# Altium PCB MADI_STM32G4_PCB_L4.PcbDoc (part 3 of 3)
Units mm, origin at the board's own origin, x right, y up, seen from the top; angles counter-clockwise.
Board outline 30 x 21.59 mm, 4 copper layers (L1, L2 (GND), L3 (GND), L4), stack 1.525 mm thick; 52 components, 52 nets, 268 pads, 180 vias.
Unrouted connection lines stored in the file: 135.
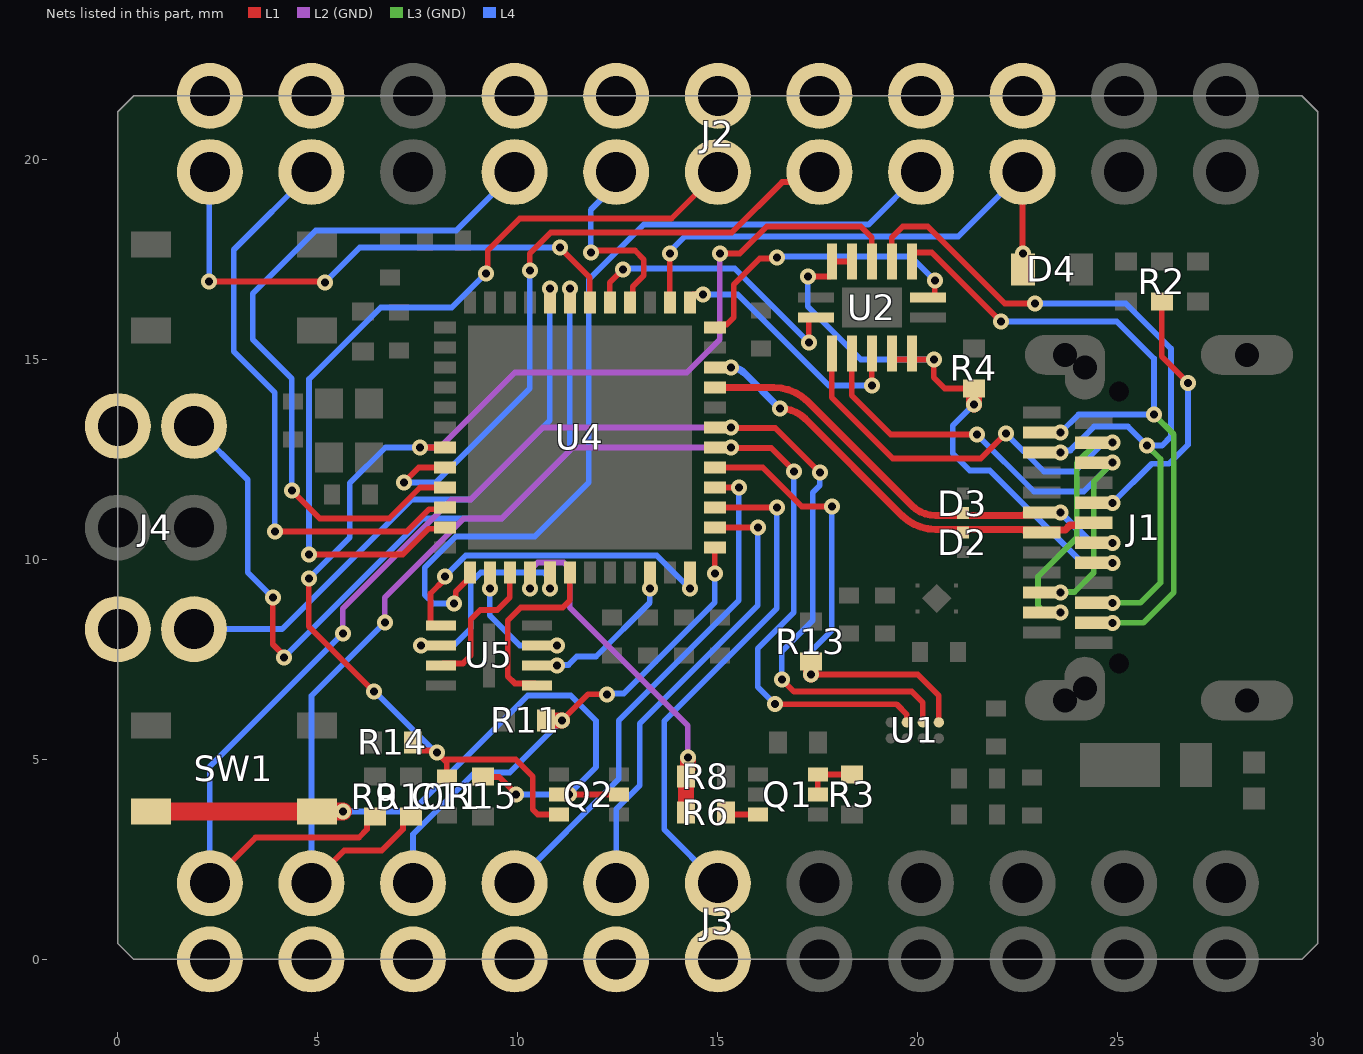
[diagram p4: the nets of this part, all layers, seen from the top]

## Via types
v1: diameter 0.4, hole 0.2, L1 to L4, tented both sides, 180 vias

## Nets (pads, with @x,y where several pads share a name; then routed paths per layer and width w, separated by ;. In a path a pad name is that pad's centre, name@x,y a point inside that pad or via, vN(x,y) a via of type N, cw(c..) or ccw(c..) an arc to the next point about the centre after c; other vN are vias at no path point) (continued)
NetJ1_B5: J1.B5 R2.2 | length 6.3
  L1 w0.146: R2.2@26.1,16.45 26.1,15.071 v1(26.756,14.415)
  L4 w0.146: v1(24.87,11.415) 25.845,12.39 26.281,12.39 26.756,12.865 v1(26.756,14.415)
NetQ1_3: Q1.3 R6.2 | length 0.8
  L1 w0.146: R6.2@15.2,3.675 15.25,3.625 Q1.3@16,3.625
NetQ1_5: Q1.5 Q1.6 R3.1 | length 1.3
  L1 w0.146: Q1.5@17.5,4.125 Q1.6@17.5,4.625 R3.1@18.35,4.625
NetQ2_2: Q2.2 Q2.5 R15.2 SW1.1 SW1.2 | length 18.3
  L1 w0.146: R15.2@9.125,4.575 9.137,4.563 9.537,4.563 9.95,4.15 v1(9.95,4.125) ; v1(11.275,4.125) Q2.5@12.525,4.125
  L1 w0.45: SW1.2@0.825,3.7 SW1.1@4.975,3.7 v1(5.625,3.7)
  L4 w0.146: v1(5.625,3.7) 7.35,3.7 10.25,6.6 11.325,6.6 11.957,5.968 11.957,4.807 v1(11.275,4.125) v1(9.95,4.125)
nIRQ_BQ: R13.2 U1.A1 U4.29 | length 12.2
  L1 w0.146: U4.29@14.925,12.3 16.125,12.3 17.1,11.325 v1(17.85,11.325) ; v1(17.325,7.125) 20,7.125 20.525,6.6 U1.A1@20.525,5.925
  L1 w0.4: v1(17.325,7.125) R13.2@17.325,7.45
  L4 w0.146: v1(17.325,7.125) 17.325,7.7 17.85,8.225 v1(17.85,11.325)
nRESET: C11.2 Q2.3 R14.1 U2.4 U4.7 | length 32.2
  L1 w0.146: v1(4.775,9.525) 4.775,8.325 v1(6.4,6.7) ; R14.1@7.375,5.425 7.375,5.375 7.525,5.225 7.925,5.225 v1(7.975,5.175) 8.225,4.925 ; v1(7.55,12.8) U4.7@8.175,12.8 ; C11.2@8.225,4.55 8.225,5 9.95,5 10.375,4.575 10.375,3.75 10.5,3.625 Q2.3@11.025,3.625 ; v1(15.05,17.65) 15.55,17.65 16.225,18.325 18.575,18.325 18.85,18.05 U2.4@18.85,17.45
  L2 (GND) w0.146: v1(7.55,12.8) 8.05,12.8 9.925,14.675 14.225,14.675 15.05,15.5 v1(15.05,17.65)
  L4 w0.146: v1(4.775,9.525) 5.8,10.55 5.8,11.91 6.69,12.8 v1(7.55,12.8) ; v1(6.4,6.7) 6.425,6.7 7.95,5.175 v1(7.975,5.175)
nRESET_SW: J1.A10 J1.B10 U2.3 | length 19.4
  L1 w0.146: U2.3@19.35,17.45 19.35,18.05 19.625,18.325 20.25,18.325 22.175,16.4 v1(22.925,16.4)
  L3 (GND) w0.146: v1(24.87,8.915) 25.565,8.915 26.066,9.416 26.066,12.51 v1(25.731,12.845)
  L4 w0.146: v1(22.925,16.4) 25.2,16.4 26.326,15.274 26.326,13.064 26.106,12.845 v1(25.731,12.845) 25.256,13.32 24.406,13.32 23.813,12.727 23.622,12.727 v1(23.57,12.675)
PA0/ADC1_IN1: J2.5 U4.8 | length 16.8
  L1 w0.146: v1(7.15,11.925) 7.525,12.3 U4.8@8.175,12.3 ; v1(10.3,17.225) 10.3,17.65 10.825,18.175 15.35,18.175 16.608,19.433 17.288,19.433 J2.5@17.54,19.685
  L4 w0.146: v1(7.15,11.925) 7.95,11.925 10.3,14.275 v1(10.3,17.225)
PA1/UART2_DE: J2.8 U4.9 | length 17.6
  L1 w0.146: v1(4.35,11.725) 5.05,11.025 6.78,11.025 7.555,11.8 U4.9@8.175,11.8
  L4 w0.146: v1(4.35,11.725) 4.35,14.524 3.375,15.499 3.375,16.65 4.95,18.225 8.46,18.225 J2.8@9.92,19.685
PA2/UART2_TX: J2.10 U4.10 | length 14.7
  L1 w0.146: v1(3.925,10.7) 7.225,10.7 7.778,11.253 8.128,11.253 U4.10@8.175,11.3
  L4 w0.146: v1(3.925,10.7) 3.925,14.175 2.9,15.2 2.9,17.745 J2.10@4.84,19.685
PA3/ADC1_IN4: J2.6 U4.11 | length 20.7
  L1 w0.146: v1(4.782,10.125) 7.125,10.125 7.766,10.766 8.141,10.766 U4.11@8.175,10.8 ; v1(9.2,17.15) 9.248,17.198 9.248,17.723 10.05,18.525 13.84,18.525 J2.6@15,19.685
  L4 w0.146: v1(4.782,10.125) 4.782,14.507 6.575,16.3 8.35,16.3 v1(9.2,17.15)
PA5/DAC1_OUT2: J2.4 U4.13 | length 21.9
  L1 w0.146: v1(8.4,8.9) 8.448,8.948 8.448,9.198 8.8,9.55 U4.13@8.8,9.675
  L4 w0.146: v1(8.4,8.9) 7.889,8.901 7.675,9.115 7.675,9.8 8.45,10.575 10.425,10.575 11.775,11.925 11.775,17 13.15,18.375 18.77,18.375 J2.4@20.08,19.685
PA8/I2C2_SDA: J3.10 R10.1 U1.C1 U4.30 | length 33.6
  L1 w0.146: J3.10@4.84,1.905 5.66,2.725 6.6,2.725 7.128,3.253 7.128,3.425 7.324,3.62 R10.1@7.325,3.62 ; U4.30@14.925,12.8 14.937,12.787 16.338,12.787 16.9,12.225 v1(16.9,12.2) ; v1@16.425,6.375 v1(16.43,6.38) 19.47,6.38 19.725,6.125 U1.C1@19.725,5.925
  L2 (GND) w0.146: v1(6.675,8.425) 6.675,9.05 8.65,11.025 9.6,11.025 11.375,12.8 v1(15.325,12.8)
  L4 w0.146: J3.10@4.84,1.905 4.84,6.59 v1(6.675,8.425) ; v1(16.43,6.38) 16,6.81 16,7.775 16.9,8.675 v1(16.9,12.2)
PA9/I2C2_SCL: J3.11 R9.1 U1.B1 U4.31 | length 37.7
  L1 w0.146: J3.11@2.3,1.905 3.445,3.05 6.027,3.05 6.232,3.255 6.232,3.426 6.404,3.598 R9.1@6.428,3.598 ; U4.31@14.925,13.3 14.937,13.287 16.438,13.287 v1(17.55,12.175) ; v1(16.6,7) 16.901,6.7 19.85,6.7 20.125,6.425 U1.B1@20.125,5.925
  L2 (GND) w0.146: v1(5.625,8.15) 5.625,8.775 8.35,11.5 8.825,11.5 10.625,13.3 v1(15.325,13.3)
  L4 w0.146: J3.11@2.3,1.905 2.3,4.825 v1(5.625,8.15) ; v1(16.6,7) 16.6,7.7 17.375,8.475 17.375,11.675 17.549,11.849 v1(17.55,12.175)
PA15/TIM2_CH1: D4.K J2.3 U4.38 | length 13
  L1 w0.146: U4.38@13.8,16.425 v1(13.8,17.65) ; v1@22.6,17.65 22.62,17.67 J2.3@22.62,19.685
  L4 w0.146: v1(13.8,17.65) 13.8,17.7 14.175,18.075 21.01,18.075 J2.3@22.62,19.685
  other v1: 22.625,17.65
PB4/UART2_RX: J2.11 U4.42 | length 13.6
  L1 w0.146: v1(2.275,16.95) 5.15,16.95 v1(5.175,16.925) ; v1(11.05,17.8) 11.8,17.05 U4.42@11.8,16.425
  L4 w0.146: v1(2.275,16.95) 2.288,16.963 2.288,19.673 J2.11@2.3,19.685 ; v1(5.175,16.925) 6.05,17.8 v1(11.05,17.8)
PB5/FDCAN2_RX: J4.3 U4.43 | length 20.1
  L1 w0.146: v1(3.875,9.05) 3.875,7.876 4.15,7.601 v1(4.15,7.55)
  L4 w0.146: J4.3@1.905,13.335 3.25,11.99 3.25,9.675 v1(3.875,9.05) ; v1(4.15,7.55) 7.625,11.025 9.6,11.025 11.3,12.725 v1(11.3,16.775)
PB6/FDCAN2_TX: J4.1 U4.44 | length 14.8
  L4 w0.146: J4.1@1.225,8.35 J4.1@1.55,8.675 ; J4.1@1.905,8.255 4.106,8.256 7.35,11.5 8.825,11.5 10.8,13.475 v1(10.8,16.775)
PB12/SPI2_nCS: J3.9 R11.1 U4.25 | length 12.9
  L1 w0.146: v1(11.1,5.975) 11.752,6.627 12.223,6.627 v1(12.225,6.625) ; v1(14.925,9.649) U4.25@14.925,10.3
  L1 w0.4: R11.1@10.7,5.975 v1(11.1,5.975)
  L4 w0.146: J3.9@7.38,1.905 7.38,3.13 8.925,4.675 9.8,4.675 v1(11.1,5.975) ; v1(12.225,6.625) 12.25,6.65 12.65,6.65 14.925,8.925 v1(14.925,9.649)
PB13/SPI2_SCK: J3.7 U4.26 | length 11.4
  L1 w0.146: U4.26@14.925,10.8 v1(16,10.8)
  L4 w0.146: J3.7@12.46,1.905 12.46,3.76 13.05,4.35 13.05,5.9 16,8.85 v1(16,10.8)
PB14/SPI2_MISO: J3.6 U4.27 | length 12.7
  L1 w0.146: U4.27@14.925,11.3 v1(16.475,11.3)
  L4 w0.146: J3.6@15,1.905 13.659,3.246 13.659,5.959 16.475,8.775 v1(16.475,11.3)
PB15/SPI2_MOSI: J3.8 U4.28 | length 13
  L1 w0.146: U4.28@14.925,11.8 v1(15.525,11.8)
  L4 w0.146: J3.8@10.054,1.905 J3.8@9.92,1.905 12.525,4.51 12.525,5.975 15.525,8.975 v1(15.525,11.8)
PC11: J2.7 U4.40 | length 4.9
  L1 w0.146: v1(11.825,17.675) 11.873,17.723 12.927,17.723 13.15,17.5 13.15,17.1 12.875,16.825 12.875,16.5 U4.40@12.8,16.425
  L4 w0.146: v1(11.825,17.675) 11.825,18.739 12.46,19.374 J2.7@12.46,19.685
QSPI_DATA0: U4.18 U5.5 | length 4.7
  L1 w0.146: U5.5@10.475,6.85 10.423,6.902 9.923,6.902 9.75,7.075 9.75,8.475 10.075,8.8 11.125,8.8 11.3,8.975 U4.18@11.3,9.675
QSPI_DATA1: U4.17 U5.2 | length 5
  L4 w0.146: v1(7.575,7.85) 8.4,7.85 8.825,8.275 8.825,9.425 9.075,9.675 10.65,9.675 10.774,9.551 10.774,9.301 v1(10.8,9.275)
QSPI_DATA2: U4.15 U5.3 | length 3.6
  L1 w0.146: U5.3@8.075,7.35 8.127,7.402 8.627,7.402 8.825,7.6 8.825,8.5 9.063,8.737 9.488,8.737 9.8,9.05 U4.15@9.8,9.675
QSPI_DATA3: U4.14 U5.7 | length 2.7
  L4 w0.146: v1(9.3,9.275) 9.3,8.6 10.05,7.85 v1(10.975,7.85)
QSPI_nCS: U4.24 U5.1 | length 8.3
  L1 w0.146: U5.1@8.075,8.35 7.867,8.35 7.815,8.402 7.815,9.147 8.175,9.507 v1(8.175,9.575)
  L4 w0.146: v1(8.175,9.575) 8.7,10.1 13.475,10.1 v1(14.3,9.275)
QSPI_SCK: U4.22 U5.6 | length 3.3
  L4 w0.146: v1(10.975,7.35) 10.988,7.363 11.263,7.363 11.475,7.575 11.955,7.575 13.3,8.92 v1(13.3,9.275)
SW_CONTROL: J1.B8 R4.2 U2.5 U2.6 U2.12 U2.13 | length 15.7
  L1 w0.146: v1(17.25,17.075) 17.8,17.075 17.85,17.125 U2.6@17.85,17.175 ; U2.6@17.85,17.238 U2.6@17.85,17.45 U2.5@18.35,17.45 ; U2.12@19.35,15.15 19.35,15.05 19.4,15 19.8,15 U2.13@19.85,15.05 ; U2.13@19.85,15.15 U2.13@19.85,15.05 ; R4.2@21.4,14.275 20.675,14.275 20.4,14.55 v1(20.4,15) 19.9,15 U2.13@19.85,15.05
  L1 w0.4: v1(21.4,13.875) R4.2@21.4,14.275
  L4 w0.146: v1(17.25,17.075) 17.25,16.325 18.575,15 v1(20.4,15) ; v1(21.4,13.875) 20.875,13.35 20.875,12.65 21.3,12.225 21.8,12.225 24.11,9.915 v1(24.87,9.915)
SWDCLK: U2.11 U4.37 | length 6.4
  L1 w0.146: U4.37@14.3,16.425 14.3,16.55 14.375,16.625 v1(14.625,16.625) ; v1(18.85,14.35) U2.11@18.85,15.15
  L4 w0.146: v1(14.625,16.625) 15.5,16.625 17.775,14.35 v1(18.85,14.35)
SWDCLK_SW: J1.A3 J1.B3 U2.10 | length 12.8
  L1 w0.146: U2.10@18.35,15.15 18.35,14.1 19.325,13.125 v1(21.475,13.125)
  L3 (GND) w0.146: v1(23.57,9.175) 23.579,9.184 23.92,9.184 24.4,9.664 24.4,11.945 v1@24.87,12.415
  L4 w0.146: v1(21.475,13.125) 22.903,11.697 24.147,11.697 v1(24.867,12.418)
SWDIO: U2.1 U4.36 | length 7.5
  L1 w0.146: U4.36@14.925,15.8 15,15.875 15.225,15.875 15.4,16.05 15.4,16.875 16.05,17.525 16.45,17.525 v1(16.475,17.55) ; U2.1@20.25,16.55 20.375,16.55 20.425,16.6 v1(20.425,16.975)
  L4 w0.146: v1(16.475,17.55) 16.5,17.575 19.825,17.575 v1(20.425,16.975)
SWDIO_SW: J1.A11 J1.B11 U2.2 | length 17.8
  L1 w0.146: U2.2@19.85,17.45 19.85,17.625 19.9,17.675 20.35,17.675 v1(22.075,15.95)
  L3 (GND) w0.146: v1(24.87,8.415) 25.64,8.415 26.4,9.175 26.4,13.126 v1(25.906,13.62)
  L4 w0.146: v1(22.075,15.95) 24.975,15.95 25.906,15.019 ; v1(23.57,13.175) 24.015,13.62 v1(25.906,13.62) 25.906,15.03
SWO: U2.8 U4.41 | length 7
  L1 w0.146: U4.41@12.3,16.425 12.3,16.925 v1(12.625,17.25) ; v1(17.275,15.425) 17.275,16.025 U2.8@17.3,16.05
  L4 w0.146: v1(12.625,17.25) 12.65,17.275 15.425,17.275 v1(17.275,15.425)
SWO_SW: J1.A2 J1.B2 U2.9 | length 15.4
  L1 w0.146: U2.9@17.85,15.15 17.85,14.05 19.375,12.525 21.575,12.525 v1(22.2,13.15)
  L3 (GND) w0.146: v1(23.57,8.675) 23.176,8.675 23.006,8.845 23.006,9.57 23.975,10.539 23.975,12.414 24.481,12.92 24.865,12.92 v1@24.87,12.915
  L4 w0.146: v1(22.2,13.15) 23.153,12.197 23.922,12.197 24.604,12.879 24.829,12.879 v1(24.867,12.918)
USB_D_N: D3.1 J1.A7 J1.B7 U4.33 | length 11.1
  L1 w0.18: U4.33@14.925,14.3 16.396,14.3 cw(c16.396,13.096) 17.247,13.948 ; 17.247,13.947 19.847,11.347 ccw(c20.445,11.945) 20.445,11.1 22.615,11.1 22.627,11.113 23.038,11.113 J1.A7@23.1,11.175
  L4 w0.18: v1(23.57,11.175) 24.33,10.415 v1(24.87,10.415)
USB_D_P: D2.1 J1.A6 J1.B6 U4.34 | length 10.8
  L1 w0.18: v1(16.55,13.775) cw(c16.55,12.87) 17.19,13.51 19.6,11.1 ccw(c20.445,11.945) 19.601,11.099 ccw(c20.445,11.945) 20.445,10.75 20.6,10.75 22.615,10.75 22.627,10.737 23.038,10.737 J1.A6@23.1,10.675 23.162,10.737 23.684,10.737 23.799,10.853 24.338,10.853 J1.B6@24.4,10.915
  L4 w0.18: v1(15.325,14.8) cw(c15.325,14.317) 15.522,14.758 cw(c15.325,14.317) 15.666,14.659 ; 15.666,14.659 v1(16.55,13.775)
VBAT_MON: R6.1 R8.2 U4.16 | length 9
  L1 w0.4: R6.1@14.2,3.625 14.2,4.525 14.225,4.55 14.225,4.767 14.25,4.792 v1@14.25,5
  L2 (GND) w0.146: v1(10.3,9.275) 10.3,9.725 10.5,9.925 11.15,9.925 11.3,9.775 11.3,8.8 14.25,5.85 v1(14.25,5.05)
  L4 w0.146: v1@14.25,5 v1(14.25,5.05)
pads on no net: J1.0 J1.A8 U4.2 U4.3 U4.4 U4.12 U4.32 U4.39 U4.45 U4.47 U5.9

## Polygon pours and split planes (outlines as drawn)
GND on L1 "NONET_L-01_P-001" (solid, remove dead copper, pour order 53): 6.555,19.685 6.555,18.003 6.758,17.8 7.25,17.8 7.325,17.725 7.875,17.725 7.875,18.225 8.205,18.555 8.205,19.685
GND on L1 "NONET_L-01_P-001" (solid, remove dead copper, pour order 52): 15.3,7.8 15.3,6.8 15.15,6.65 14.85,6.65 14.1,7.4 12.1,7.4 12.5,7.8
+3V3 on L1 "NONET_L-01_P-001" (solid, remove dead copper, pour order 51): 2.65,15.125 2.375,15.4 0.325,15.4 0.325,16.05 5.475,16.05 5.475,15.4 4.125,15.4 3.25,14.525
+3V3 on L1 "NONET_L-01_P-001" (solid, remove dead copper, pour order 50): 4.063,5.994 3.944,5.875 3.244,5.875 2.45,5.875 2.45,6.15 3.25,6.95 4.063,6.137
+3V3 on L1 "NONET_L-01_P-001" (solid, remove dead copper, pour order 48): 8.425,18.225 8.425,17.725 7.95,17.25 6.55,17.25 6.55,16.825 7.15,16.825 7.45,16.825 7.9,16.375 7.9,15.65 8.45,15.65 8.45,15.95 8.65,16.15 8.95,16.15 8.95,16.7 8.825,16.825 8.825,18.225
SWDCLK on L1 "NONET_L-01_P-001" (solid, remove dead copper, pour order 44): 14.775,16.75 14.65,16.875 14.325,16.875 14.15,16.7 14.15,16.15 14.45,16.15 14.775,16.475
nIRQ_BQ on L1 "NONET_L-01_P-001" (solid, remove dead copper, pour order 42): 17.6,7.675 17.6,7.225 17.7,7.125 17.325,7.125 17.325,7.675
+3V3 on L1 "NONET_L-01_P-001" (solid, remove dead copper, pour order 7): 9.45,5.225 10.075,5.225 10.125,5.175 11.125,5.175 11.25,5.3 10.975,5.575 10,5.575 9.925,5.65 9.925,6.25 9.875,6.3 0.225,6.3 0.225,5.525 0.6,5.15 5.805,5.15 6.153,4.801 6.153,4.351 7.599,4.351 7.6,4.35 7.6,4.8 6.705,4.8 6.6,4.905 6.6,5.8 6.7,5.9 7.9,5.9 8.622,5.178 9.403,5.178
+VSYS on L1 "NONET_L-01_P-001" (solid, remove dead copper, pour order 0): 21.225,4.825 21.075,4.975 20.75,4.975 20.24,5.485 20.24,5.525 20.01,5.525 20.01,4.44 20.175,4.275 21.225,4.275
GND on L1 "NONET_L-01_P-001" (solid, remove dead copper, pour order 3): 18.85,5 18.85,4.375 18.95,4.275 19.325,4.275 19.44,4.39 19.44,5.525 19.325,5.64 18.665,5.64 18.575,5.55 18.575,5.275
+VBAT on L1 "NONET_L-01_P-001" (solid, remove dead copper, pour order 4): 19.125,2.035 19.125,3.05 18.775,3.4 17.3,3.4 17.25,3.45 17.25,3.8 17.3,3.85 19.175,3.85 19.61,4.285 19.61,5.525 19.84,5.525 19.84,4.285 20.25,3.875 21.225,3.875 21.225,2.225 20.905,1.905 19.255,1.905
+VIN_5V0 on L1 "NONET_L-01_P-001" (solid, remove dead copper, pour order 5): 24.55,3.725 25.175,3.725 25.65,3.25 26.05,3.65 26.05,5.405 25.815,5.64 20.525,5.64 20.525,5.41 20.915,5.41 21.325,5 22.35,5 22.6,4.75 22.6,4.35 23.925,4.35
GND on L1 "NONET_L-01_P-001" (solid, remove dead copper, pour order 6): 22.175,4.775 22.175,4.225 22.6,3.8 23.1,3.8 23.445,3.455 23.445,1.905 21.795,1.905 21.775,1.925 21.775,4.775
GND on L1 "NONET_L-01_P-001" (solid, remove dead copper, pour order 8): 22.63,7.76 22.63,8.327 23.57,8.327 23.83,8.067 24.87,8.067 24.87,7.762 24.684,7.577 24.684,6.114 24.525,5.955 21.325,5.955 21.225,6.055 21.225,6.355
GND on L1 "NONET_L-01_P-001" (solid, remove dead copper, pour order 12): 26.375,17.225 24.925,17.225 24.925,17.675 25.3,18.05 26,18.05 26.375,17.675
GND on L1 "NONET_L-01_P-001" (solid, remove dead copper, pour order 17): 22.681,13.975 22.381,13.675 22.534,13.523 23.67,13.523 23.93,13.263 24.87,13.263 24.87,13.567 24.681,13.756 24.681,15.113 22.681,15.113
+VBUS on L1 "NONET_L-01_P-001" (solid, remove dead copper, pour order 18): 23.938,9.567 23.93,9.56 23.93,9.262 25.267,9.262 25.95,8.58 25.95,5.875 26.55,5.275 26.55,4.425 27.35,4.425 27.35,5.625 26.85,6.125 26.85,11.375 26.158,12.067 23.893,12.067 23.898,12.062 23.898,11.762 25.567,11.762 25.95,11.38 25.95,9.905 25.612,9.567
GND on L1 "NONET_L-01_P-001" (solid, remove dead copper, pour order 32): 18.025,8.35 18.025,7.675 18.27,7.43 20.25,7.43 20.25,7.93 20.265,7.944 20.265,8.68 20.115,8.83 19.875,8.83 19.875,8.488 19.737,8.35
+VSYS on L1 "NONET_L-01_P-001" (solid, remove dead copper, pour order 33): 21.211,9.65 21.25,9.611 21.25,8.375 21.25,7.1 21.2,7.05 20.85,7.05 20.8,7.1 20.8,8.35 20.685,8.465 20.685,8.68 20.835,8.83 20.835,9.22 20.685,9.37 20.685,9.585 20.75,9.65
GND on L1 "NONET_L-01_P-001" (solid, remove dead copper, pour order 37): 7.975,3.8 7.975,3.2 8.325,2.85 9.05,2.85 9.4,3.2 9.4,3.8
nRESET on L1 "NONET_L-01_P-001" (solid, remove dead copper, pour order 38): 8.475,4.827 8.624,4.976 8.575,5.025 7.9,5.7 7.15,5.7 7.15,5.15 7.6,5.15 7.975,4.775 7.975,4.35 8.475,4.35
GND on L1 "NONET_L-01_P-001" (solid, remove dead copper, pour order 40): 20.306,8.488 20.306,7.985 20.265,7.944 19.875,8.334 19.875,8.83 19.912,8.83 20.475,9.393 20.843,9.025
+3V3 on L1 "NONET_L-01_P-001" (solid, remove dead copper, pour order 41): 15.825,9.75 14.825,8.75 14.175,8.75 13.95,8.975 13.95,9.95 13.65,9.95 13.65,8.95 13.45,8.75 13.15,8.75 12.95,8.95 12.95,9.95 12.15,9.95 12.15,8.921 11.9,8.671 11.9,8.55 11.37,8.55 11.17,8.35 15.3,8.35 15.625,8.025 15.625,7.675 15.925,7.675 16.475,8.225 17.6,8.225 17.6,8.675 17.825,8.9 19.795,8.9 20.265,9.37 20.265,9.61 20.125,9.75
+3V3 on L4 "NONET_L-01_P-001" (solid, remove dead copper, pour order 49): 18.725,8.9 18.725,9.1 19.075,9.45 19.075,12.675 19.525,13.125 18.375,13.125 18.8,12.7 18.8,10.545 18.082,9.827 18.082,9.248 18.43,8.9
+VSYS on L4 "NONET_L-01_P-001" (solid, remove dead copper, pour order 29): 20.175,5.05 20.175,4.1 20.55,3.725 23.375,3.725 24.335,2.765 24.335,1.905 25.985,1.905 25.985,3.04 24.75,4.275 20.9,4.275 20.575,4.6 20.575,5.05
GND on L2 (GND) "NONET_L-01_P-001" (solid, remove dead copper, pour order 45): -2.5,25 -2.5,-2.5 35,-2.5 35,25
GND on L3 (GND) "NONET_L-01_P-001" (solid, remove dead copper, pour order 46): -2.5,25 -2.5,-2.5 35,-2.5 35,25

## Keep-outs
Keep-Out Layer:
  text ".Layer_Name" at 22,-15.5 h1.52

## Other copper
L1:
  rectangle net GND: 21.55,5.955 22.325,6.25
  text ".Layer_Name" at 22,-15.5 h1.52
L2 (GND):
  text ".Layer_Name" at 22,-15.5 h1.52
L3 (GND):
  text ".Layer_Name" at 22,-15.5 h1.52
L4:
  text ".Layer_Name" at 22,-15.5 h1.52

## Silkscreen, mask and mechanical layers (free items; w line width, h text height)
Top Overlay:
  region: 115.3,51.8
  text ".VersionRevision" at 27.973,16.372 h1.5
  text ".Layer_Name" at 22,-15.5 h1.52
Bottom Overlay:
  text "A1" at 9.366,17.028 h1.5 r270
  text "A3" at 14.446,16.863 h1.5 r270
  text "A0" at 16.986,16.866 h1.5 r270
  text "A5" at 19.526,16.868 h1.5 r270
  text "RX" at 1.746,16.775 h1.5 r270
  text "TX" at 4.286,16.75 h1.5 r270
  text "C11" at 11.906,16.378 h1.5 r270
  text "A15" at 22.066,16.144 h1.5 r270
  text "GND" at 24.606,15.94 h1.5 r270
  text "3V3" at 27.146,15.94 h1.5 r270
  text "BOOT" at 0.575,15.837 h1.5 r180
  text "GND" at 6.826,15.822 h1.5 r270
  text "B5" at 2.991,13.856 h1.5 r180
  text "GND" at 2.991,11.317 h1.5 r180
  text "B6" at 2.991,8.777 h1.5 r180
  text "`" at 9.745,7.212 h15 r270
  text "STM32G4" at 6.925,6.973 h2.5 r270
  text "RST" at 0.665,6.887 h1.5 r180
  text "SCL" at 1.871,3.1 h1.5 r270
  text "SDA" at 4.411,3.1 h1.5 r270
  text "nCS" at 6.951,3.101 h1.5 r270
  text "MOSI" at 9.491,3.1 h1.5 r270
  text "SCK" at 12.031,3.1 h1.5 r270
  text "MISO" at 14.571,3.1 h1.5 r270
  text "GND" at 16.998,3 h1.5 r270
  text "BAT" at 19.551,3 h1.5 r270
  text "GND" at 22.078,3 h1.5 r270
  text "SYS" at 24.618,3 h1.5 r270
  text "VIN" at 27.159,3 h1.5 r270
  text ".Layer_Name" at 22,-15.5 h1.52
Top Paste:
  text ".Layer_Name" at 22,-15.5 h1.52
Bottom Paste:
  text ".Layer_Name" at 22,-15.5 h1.52
Top Solder:
  text ".Layer_Name" at 22,-15.5 h1.52
Bottom Solder:
  text ".Layer_Name" at 22,-15.5 h1.52
Drill Guide:
  text ".Layer_Name" at 22,-15.5 h1.52
Board Outline:
  the board outline again, w0
  text ".Layer_Name" at 22,-15.5 h1.52
Top Assembly:
  text "COMPONENTS MARKED 'DNP' SHOULD NOT BE POPULATED." at 0,-7.001 h1.52
  text ".Layer_Name" at 22,-15.5 h1.52
Bottom Assembly:
  text "COMPONENTS MARKED 'DNP' SHOULD NOT BE POPULATED." at 131,-7.001 h1.52
  text ".Layer_Name" at 22,-15.5 h1.52
Top Courtyard:
  text ".Layer_Name" at 22,-15.5 h1.52
Bottom Courtyard:
  text ".Layer_Name" at 22,-15.5 h1.52
Top 3D Body:
  text ".Layer_Name" at 22,-15.5 h1.52
Bottom 3D Body:
  text ".Layer_Name" at 22,-15.5 h1.52
Top Designator:
  text ".Layer_Name" at 22,-15.5 h1.52
Bottom Designator:
  text ".Layer_Name" at 22,-15.5 h1.52
Gerber Information:
  lines w0.1: 0,-17 111,-17 ; 0,-12.5 131,-12.5 ; 55,-21.5 55,-8 ; 111,-21.5 111,-8 ; 0,-21.5 0,-8 131,-8 131,-21.5 0,-21.5
  text "ALL ARTWORK VIEWED FROM TOP SIDE" at 2,-11 h1.52
  text "PRJ TITLE =" at 57.5,-11 h1.52
  text ".Project" at 76,-11 h1.52
  text "REV =" at 113,-11 h1.52
  text ".VersionRevision" at 122.5,-11 h1.52
  text "LAYER NAME =" at 2,-15.5 h1.52
  text "PRJ # =" at 57.5,-15.5 h1.52
  text ".ProjectNumber" at 70,-15.5 h1.52
  text "DRAWN BY" at 113,-15.5 h1.52
  text ".DrawnBy" at 115.5,-19.5 h1.52
  text "CONTACT =" at 2,-20 h1.52
  text ".Contact" at 17.5,-20 h1.52
  text "GENERATED =" at 57.5,-20 h1.52
  text ".Print_Date" at 76.5,-20 h1.52
  text ".Print_Time" at 94,-20 h1.52
Fab Notes:
  lines w0.2: -0.02,16.535 -1.32,16.535 0,17.855 0,8.255 ; 2.3,0 33.605,0 32.285,1.32 32.285,0.02 ; 2.3,21.59 33.605,21.59 32.285,22.91 32.285,21.61 ; 34.595,10.895 34.595,12.195 33.275,10.875 57.575,10.875
  lines w2.5: 31.25,5.795 31.25,15.795
  text "TYPE;" at 103.325,125.2 h2.54
  text "Impedance;" at 116.025,125.2 h2.54
  text "Layer (Reference);" at 136.345,125.174 h2.54
  text "Width (um);" at 171.905,125.174 h2.54
  text "Gap (um);" at 194.765,125.172 h2.54
  text "50 ohm;" at 116.025,122.655 h2.54
  text "146;" at 171.905,122.655 h2.54
  text "SE;" at 103.325,122.632 h2.54
  text "L1(L2), L4(L3);" at 136.345,122.634 h2.54
  text "DIFF;" at 103.325,120.16 h2.54
  text "90 ohm;" at 116.025,120.155 h2.54
  text "L1(L2), L4(L3);" at 136.345,120.134 h2.54
  text "180;" at 171.905,120.155 h2.54
  text "170;" at 194.805,120.155 h2.54
  text "Files / *.GTO - Top Overlay / *.GTP - Top Paste / *.GTS - Top Solder / *.GTL - L1 / *.G1 - L2 (GND) / *.G2  - L3 / *.GBL - L4 / *.GBS - Bottom Solder / *.GBP - Bottom Paste / *.GBO - Bottom Overlay / *.GM1 - Board Outline / *.GM12 - Fab Notes / *.GD1 - Drill Drawing / *.GG1 - Drill Guide /  / Layer Stack Table: JLC3313" at 0,110.698 h2.54
  text "BOARD INFORMATION /  / Minimum Track: 146um / Minimum Gap: 100um / Minimum Through Hole VIA: 0.20mm (drill). Drilling: L1-L4 /  / 1. REMOVE ALL NON-FUNCTIONAL INNER LAYER PADS. /  / 2. THIS BOARD CONTAINS IMPEDANCE CONTROLLED TRACKS, TRACK AND GAP SIZES ARE AS FOLLOWS: /  /  /  /  /  /  /  / 3. FINISHED PANEL THICKNESS IS NOT CRITICAL: TO BE APPROXIMATELY 1.6mm /  / 4. SURFACE FINISH: Immersion Gold (ENIG) /  / 5. SOLDER RESIST: APPLY TO BOTH SIDES COLOR - MATT BLACK /  / 6. COMPONENT IDENT: COLOR TO BE WHITE /  / 7. PANEL BY PCB MANUFACTURER" at 100,94.652 h2.54
  text "Castellated edges" at 34.035,21.671 h1.52
  text "Castellated edges" at -0.081,18.285 h1.52 r90
  text "This slot must be in a panel design." at 35.775,11.561 h1.52
  text "Castellated edges" at 34.035,0.081 h1.52
  text ".Layer_Name" at 22,-15.5 h1.52
Drill Drawing:
  circle w0.254: c2.556,69.362 r0.847
  lines w0.254: 1.709,60.895 2.556,61.318 3.403,60.895 2.979,61.742 3.403,62.588 2.556,62.165 1.709,62.588 2.133,61.742 1.709,60.895 ; 1.709,66.398 3.403,66.398 2.556,64.705 1.709,66.398 ; 1.709,72.325 3.403,72.325 3.403,74.018 1.709,74.018 1.709,72.325 ; 1.709,76.558 2.133,76.558 2.556,76.135 2.979,76.558 3.403,76.558 2.979,76.982 3.403,77.405 2.979,77.405 2.556,77.828 2.133,77.405 1.709,77.405 2.133,76.982 1.709,76.558 ; 1.709,80.368 2.133,80.368 2.133,79.945 2.979,79.945 2.979,80.368 3.403,80.368 3.403,81.215 2.979,81.215 2.979,81.638 2.133,81.638 2.133,81.215 1.709,81.215 1.709,80.368
  lines w0.381: 0.191,59.752 196.529,59.752 ; 0.191,82.612 196.529,82.612 ; 14.183,55.942 14.183,86.422 ; 29.419,55.942 29.419,86.422 ; 57.351,55.942 57.351,86.422 ; 70.2,55.942 70.2,86.422 ; 88.838,55.942 88.838,86.422 ; 119.056,55.942 119.056,86.422 ; 134.038,55.942 134.038,86.422 ; 152.981,55.942 152.981,86.422 ; 0.191,55.942 196.529,55.942 196.529,86.422 0.191,86.422 0.191,55.942
  text "Symbol" at 2.476,83.755 h1.83
  text "Count" at 15.326,83.755 h1.83
  text "Hole Size" at 30.562,83.755 h1.83
  text "Plated" at 58.494,83.755 h1.83
  text "Hole Type" at 71.343,83.755 h1.83
  text "Drill Layer Pair" at 89.981,83.755 h1.83
  text "Via/Pad" at 120.199,83.755 h1.83
  text "Pad Shape" at 135.181,83.755 h1.83
  text "Template" at 154.124,83.755 h1.83
  text "180" at 15.326,79.945 h1.52
  text "0.200mm (7.87mil)" at 30.562,79.945 h1.52
  text "PTH" at 58.494,79.945 h1.52
  text "Round" at 71.343,79.945 h1.52
  text "L1 - L4" at 89.981,79.945 h1.52
  text "Via" at 120.199,79.945 h1.52
  text "Rounded" at 135.181,79.945 h1.52
  text "v40h20m0mx0" at 154.124,79.945 h1.52
  text "2" at 15.326,76.135 h1.52
  text "0.500mm (19.69mil)" at 30.562,76.135 h1.52
  text "NPTH" at 58.494,76.135 h1.52
  text "Round" at 71.343,76.135 h1.52
  text "L1 - L4" at 89.981,76.135 h1.52
  text "Pad" at 120.199,76.135 h1.52
  text "Rounded" at 135.181,76.135 h1.52
  text "c0hn50m55" at 154.124,76.135 h1.52
  text "2" at 15.326,72.325 h1.52
  text "0.600mm (23.62mil)" at 30.562,72.325 h1.52
  text "PTH" at 58.494,72.325 h1.52
  text "Slot" at 71.343,72.325 h1.52
  text "L1 - L4" at 89.981,72.325 h1.52
  text "Pad" at 120.199,72.325 h1.52
  text "Rounded" at 135.181,72.325 h1.52
  text "(Mixed)" at 154.124,72.325 h1.52
  text "2" at 15.326,68.515 h1.52
  text "0.600mm (23.62mil)" at 30.562,68.515 h1.52
  text "PTH" at 58.494,68.515 h1.52
  text "Slot" at 71.343,68.515 h1.52
  text "L1 - L4" at 89.981,68.515 h1.52
  text "Pad" at 120.199,68.515 h1.52
  text "Rounded" at 135.181,68.515 h1.52
  text "(Mixed)" at 154.124,68.515 h1.52
  text "2" at 15.326,64.705 h1.52
  text "0.600mm (23.62mil)" at 30.562,64.705 h1.52
  text "PTH" at 58.494,64.705 h1.52
  text "Slot" at 71.343,64.705 h1.52
  text "L1 - L4" at 89.981,64.705 h1.52
  text "Pad" at 120.199,64.705 h1.52
  text "Rounded" at 135.181,64.705 h1.52
  text "r230_100h60_190r100m235_105" at 154.124,64.705 h1.52
  text "50" at 15.326,60.895 h1.52
  text "1.000mm (39.37mil)" at 30.562,60.895 h1.52
  text "PTH" at 58.494,60.895 h1.52
  text "Round" at 71.343,60.895 h1.52
  text "L1 - L4" at 89.981,60.895 h1.52
  text "Pad" at 120.199,60.895 h1.52
  text "Rounded" at 135.181,60.895 h1.52
  text "c165h100" at 154.124,60.895 h1.52
  text "238 Total" at 15.326,57.085 h1.52
  text "Slot definitions :" at 2.476,53.403 h1.52
  text "Routed Path Length" at 28.707,53.403 h1.52
  text "= Calculated from tool start centre position to tool end centre position." at 56.715,53.403 h1.52
  text "Hole Length" at 28.707,50.863 h1.52
  text "= Routed Path Length + Tool Size = Slot length as defined in the PCB layout" at 46.304,50.863 h1.52
  text ".Layer_Name" at 22,-15.5 h1.52

## Dimensions
0.4,0 to 0.4,21.59 on Dimensions
0,21.19 to 30,21.19 on Dimensions